# EAGLE board Ex FTDI Cable (EAGLE 7.2.0)
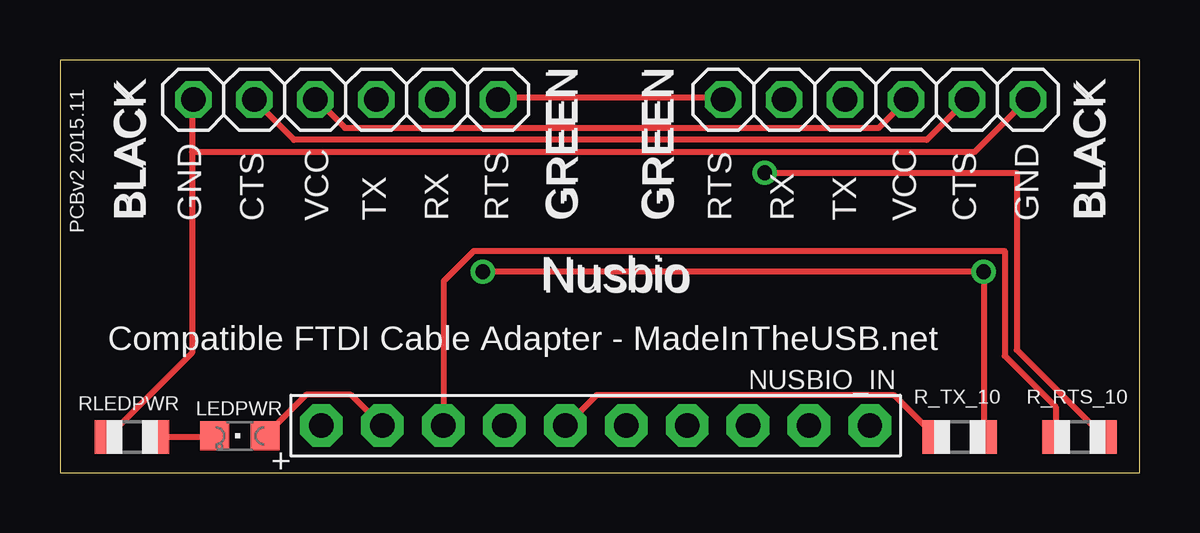
[diagram p0: board, top side]
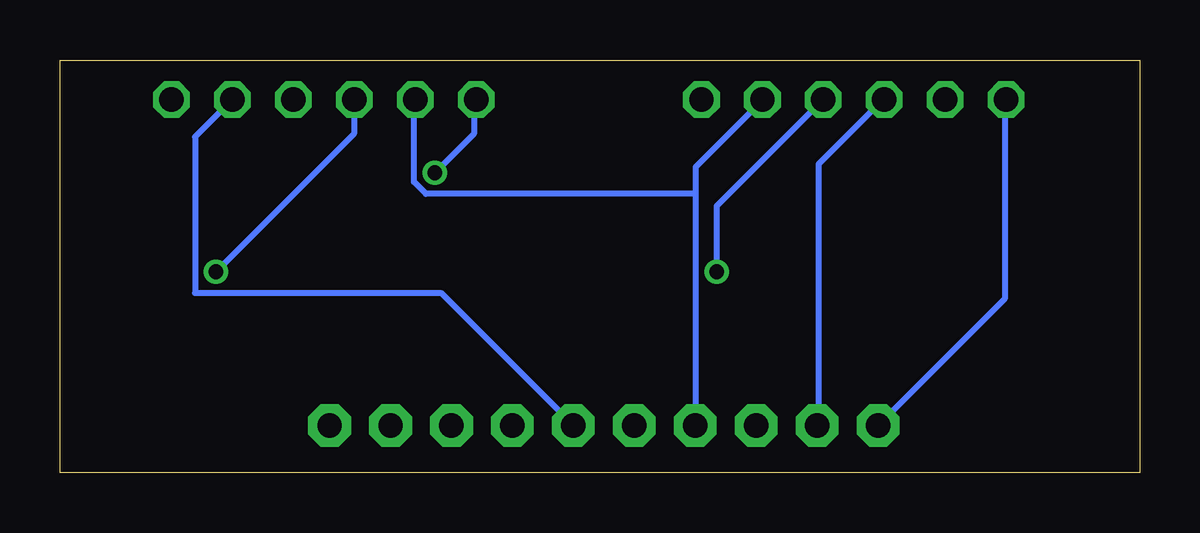
[diagram p1: board, bottom side, seen from below]

Size 45 x 17.2 mm. Coordinates in mm from the lower left corner, seen from the top.
Outline: 0,0 45,0 45,17.2 0,17.2 0,0
Copper layers (1*16): Top 0.035mm / dielectric 1.5mm / Bottom 0.035mm
Design rules "default": minimum track width 10mil, minimum drill 24mil, track to track 8mil, track to pad 8mil, pad to pad 8mil, via to via 8mil, smd to smd 8mil, copper to edge 40mil, drill to drill 8mil, minimum pad ring 10mil, minimum via ring 8mil, stop-mask expansion 4mil, vias tented up to drill 0mil, thermal gap 10mil

## Footprints (pad centres in the part's own frame; a part is rotated, then mirrored left to right if it is on the bottom)
CHIPLED_0805 = smd 1.2 x 1.2: A 0,-1.05; C 0,1.05
1X10-BIG = drill 1.016 pad 1.778 octagon: 1 -11.43,0; 2 -8.89,0; 3 -6.35,0; 4 -3.81,0; 5 -1.27,0; 6 1.27,0; 7 3.81,0; 8 6.35,0; 9 8.89,0; 10 11.43,0
1X06 = drill 1.016 octagon: 1 -6.35,0; 2 -3.81,0; 3 -1.27,0; 4 1.27,0; 5 3.81,0; 6 6.35,0
R0805 = smd 1.1 x 1.4: 1 -1,0; 2 1,0

## Placement (x,y rotation side)
LEDPWR  [CHIPLED_0805]  7.5,1.54 90 top
NUSBIO_IN  PINHD-1X10  [1X10-BIG]  22.33,1.97 180 top
OUT  [1X06]  11.91,15.55 0 top
OUT1  [1X06]  34,15.55 0 top
R_RTS_10  [R0805]  42.5,1.5 180 top
R_TX_10  [R0805]  37.5,1.5 180 top
RLEDPWR  [R0805]  3,1.5 180 top

## Library data of the parts
LEDPWR NUSBIO_IN OUT OUT1 R_RTS_10 R_TX_10 RLEDPWR = adafruit

## Nets
GND: NUSBIO_IN.10 OUT1.6 OUT.1 RLEDPWR.2
N$1: NUSBIO_IN.5 OUT1.5 OUT.2
N$2: NUSBIO_IN.6 R_TX_10.2
N$3: NUSBIO_IN.7 OUT1.2 OUT.5
N$4: NUSBIO_IN.8 R_RTS_10.2
N$5: OUT1.3 OUT.4 R_TX_10.1
N$6: OUT1.1 OUT.6 R_RTS_10.1
N$11: LEDPWR.C RLEDPWR.1
N$14: LEDPWR.A NUSBIO_IN.9 OUT1.4 OUT.3

## Tracks (layer width: path | path; a pad name or v marks a point on that pad's centre or on a via)
GND
  Top 0.254: RLEDPWR.2 5.5,5 5.5,13.38 | 5.5,13.38 5.5,15.5 OUT.1 | 5.5,13.38 38.12,13.38 40.25,15.5 OUT1.6
  Bottom 0.254: NUSBIO_IN.10 10.88,2 5.62,7.25 5.62,15.5 OUT.1
N$1
  Top 0.254: OUT.2 8.12,15.5 9.75,13.88 36.12,13.88 37.75,15.5 OUT1.5
  Bottom 0.254: NUSBIO_IN.5 23.62,2 29.12,7.5 39.38,7.5 39.38,14 37.88,15.5 OUT1.5
N$2
  Top 0.254: R_TX_10.2 34.75,3.25 22.38,3.25 21.12,2 NUSBIO_IN.6
N$3
  Bottom 0.254: 18.5,11.62 18.5,2 NUSBIO_IN.7 | 18.5,11.62 18.5,12.75 15.75,15.5 OUT.5 | 18.5,11.62 29.75,11.62 30.25,12.12 30.25,15.5 OUT1.2
N$4
  Top 0.254: R_RTS_10.2 41.5,2.75 39.38,4.88 39.38,9.25 17.25,9.25 16,8 16,2 NUSBIO_IN.8
N$5  (via drill 0.61)
  Top 0.254: R_TX_10.1 v38.5,8.38 v17.62,8.38
  Bottom 0.254: v38.5,8.38 32.75,14.12 32.75,15.5 OUT1.3 | v17.62,8.38 17.62,11.12 13.25,15.5 OUT.4
N$6  (via drill 0.61)
  Top 0.254: R_RTS_10.1 39.88,5.12 39.88,12.5 v29.38,12.5 | OUT.6 18.38,15.62 27.62,15.62 OUT1.1
  Bottom 0.254: v29.38,12.5 27.75,14.12 27.75,15.5 OUT1.1
N$11
  Top 0.254: RLEDPWR.1 6.38,1.5 LEDPWR.C
N$14
  Top 0.254: LEDPWR.A 8.62,1.62 10.25,3.25 12.12,3.25 13.38,2 NUSBIO_IN.9 | OUT1.4 35.25,15.5 34.12,14.38 11.88,14.38 10.75,15.5 OUT.3
  Bottom 0.254: OUT.3 10.75,15.5 13.38,12.88 13.38,2 NUSBIO_IN.9

## Text on the board
tNames: BLACK | GREEN | GREEN | BLACK | PCBv2 2015.11 | BLACK | BLACK | GND | CTS | VCC | TX | RX | RTS | GREEN | GREEN | RTS | RX | TX | VCC | CTS | GND | BLACK | Nusbio | Nusbio | Compatible FTDI Cable Adapter - MadeInTheUSB.net | +